# Altium PCB 6路电磁.PcbDoc
Units mil, origin at the board's own origin, x right, y up, seen from the top; angles counter-clockwise.
Board outline 1584.83 x 1269.87 mil, 2 copper layers (Top Layer, Bottom Layer); 42 components, 34 nets, 119 pads, 78 vias.
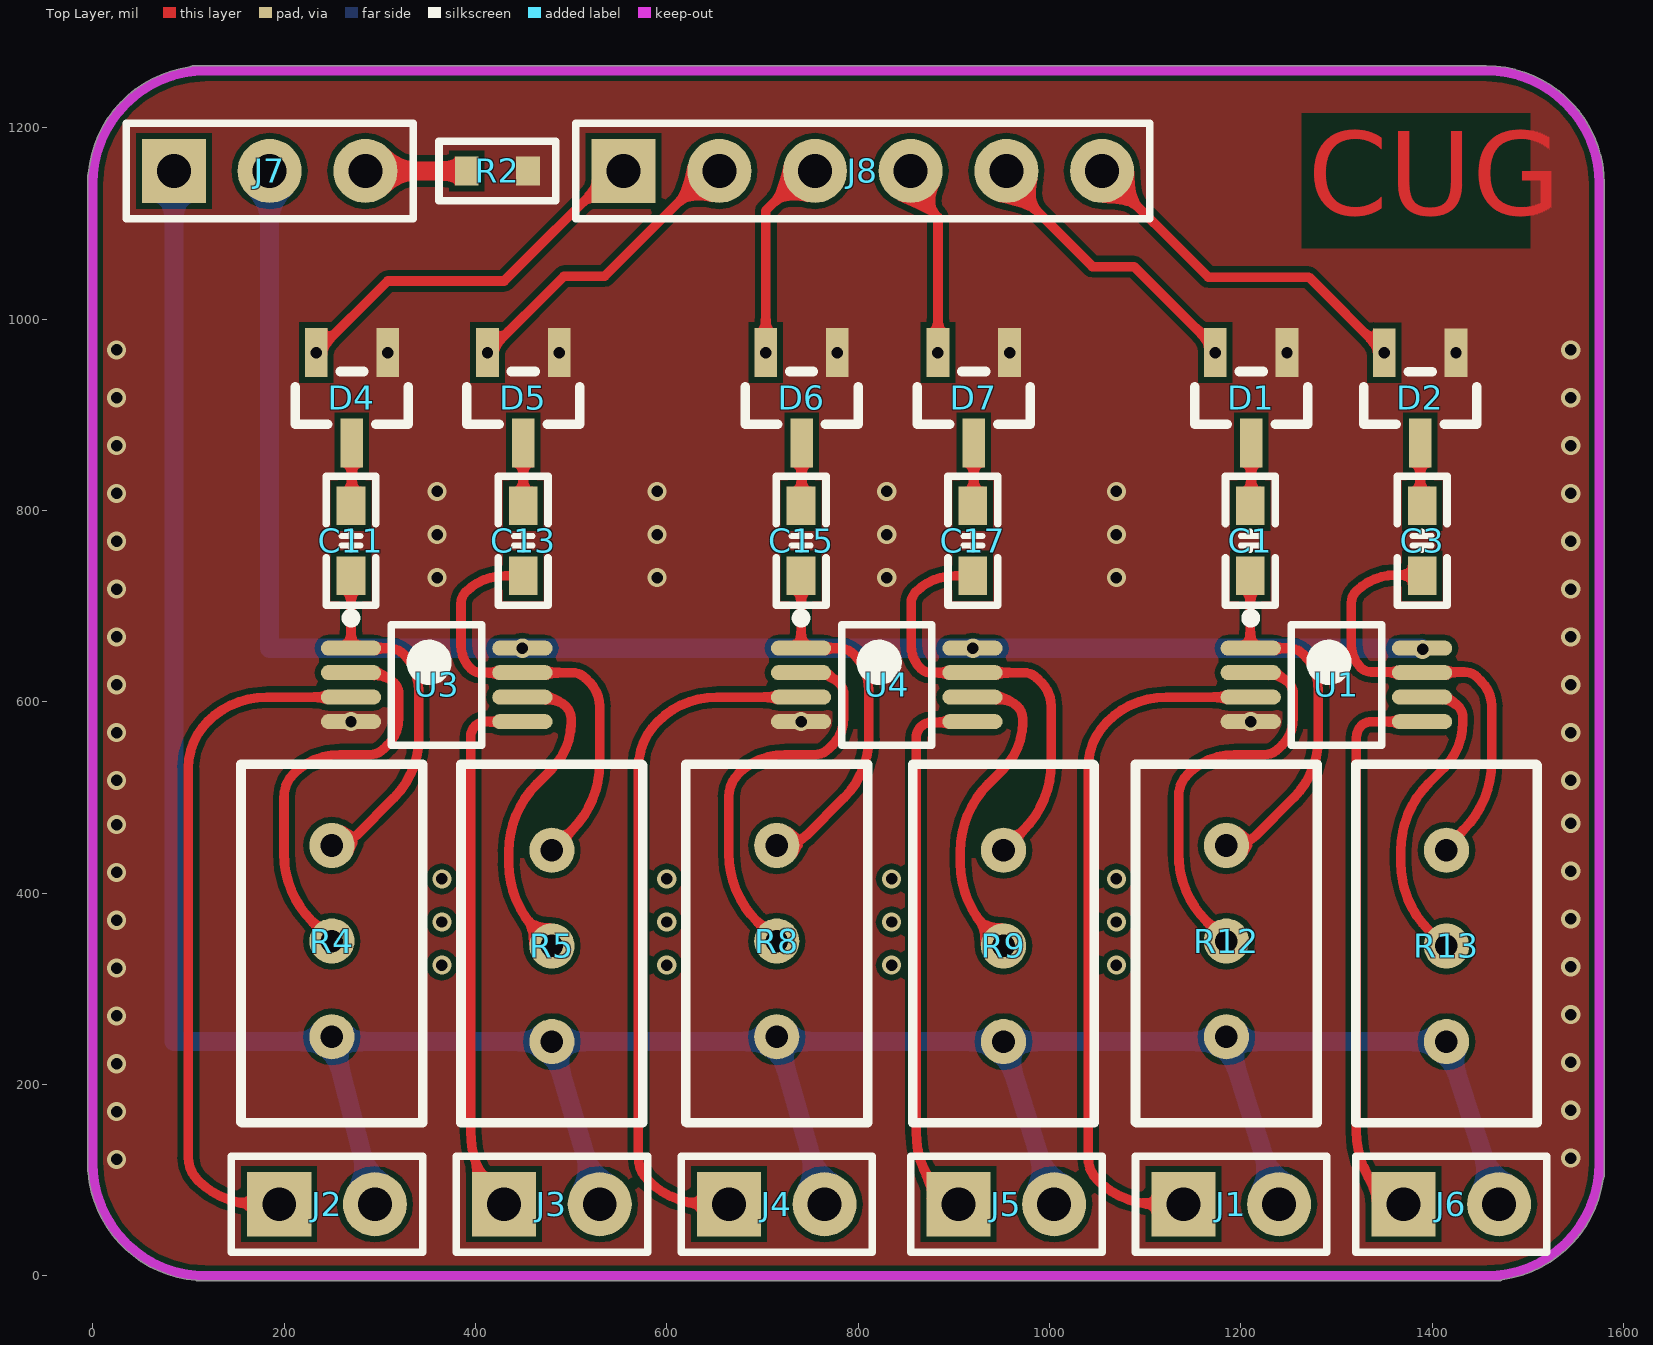
[diagram p0: Top Layer view]
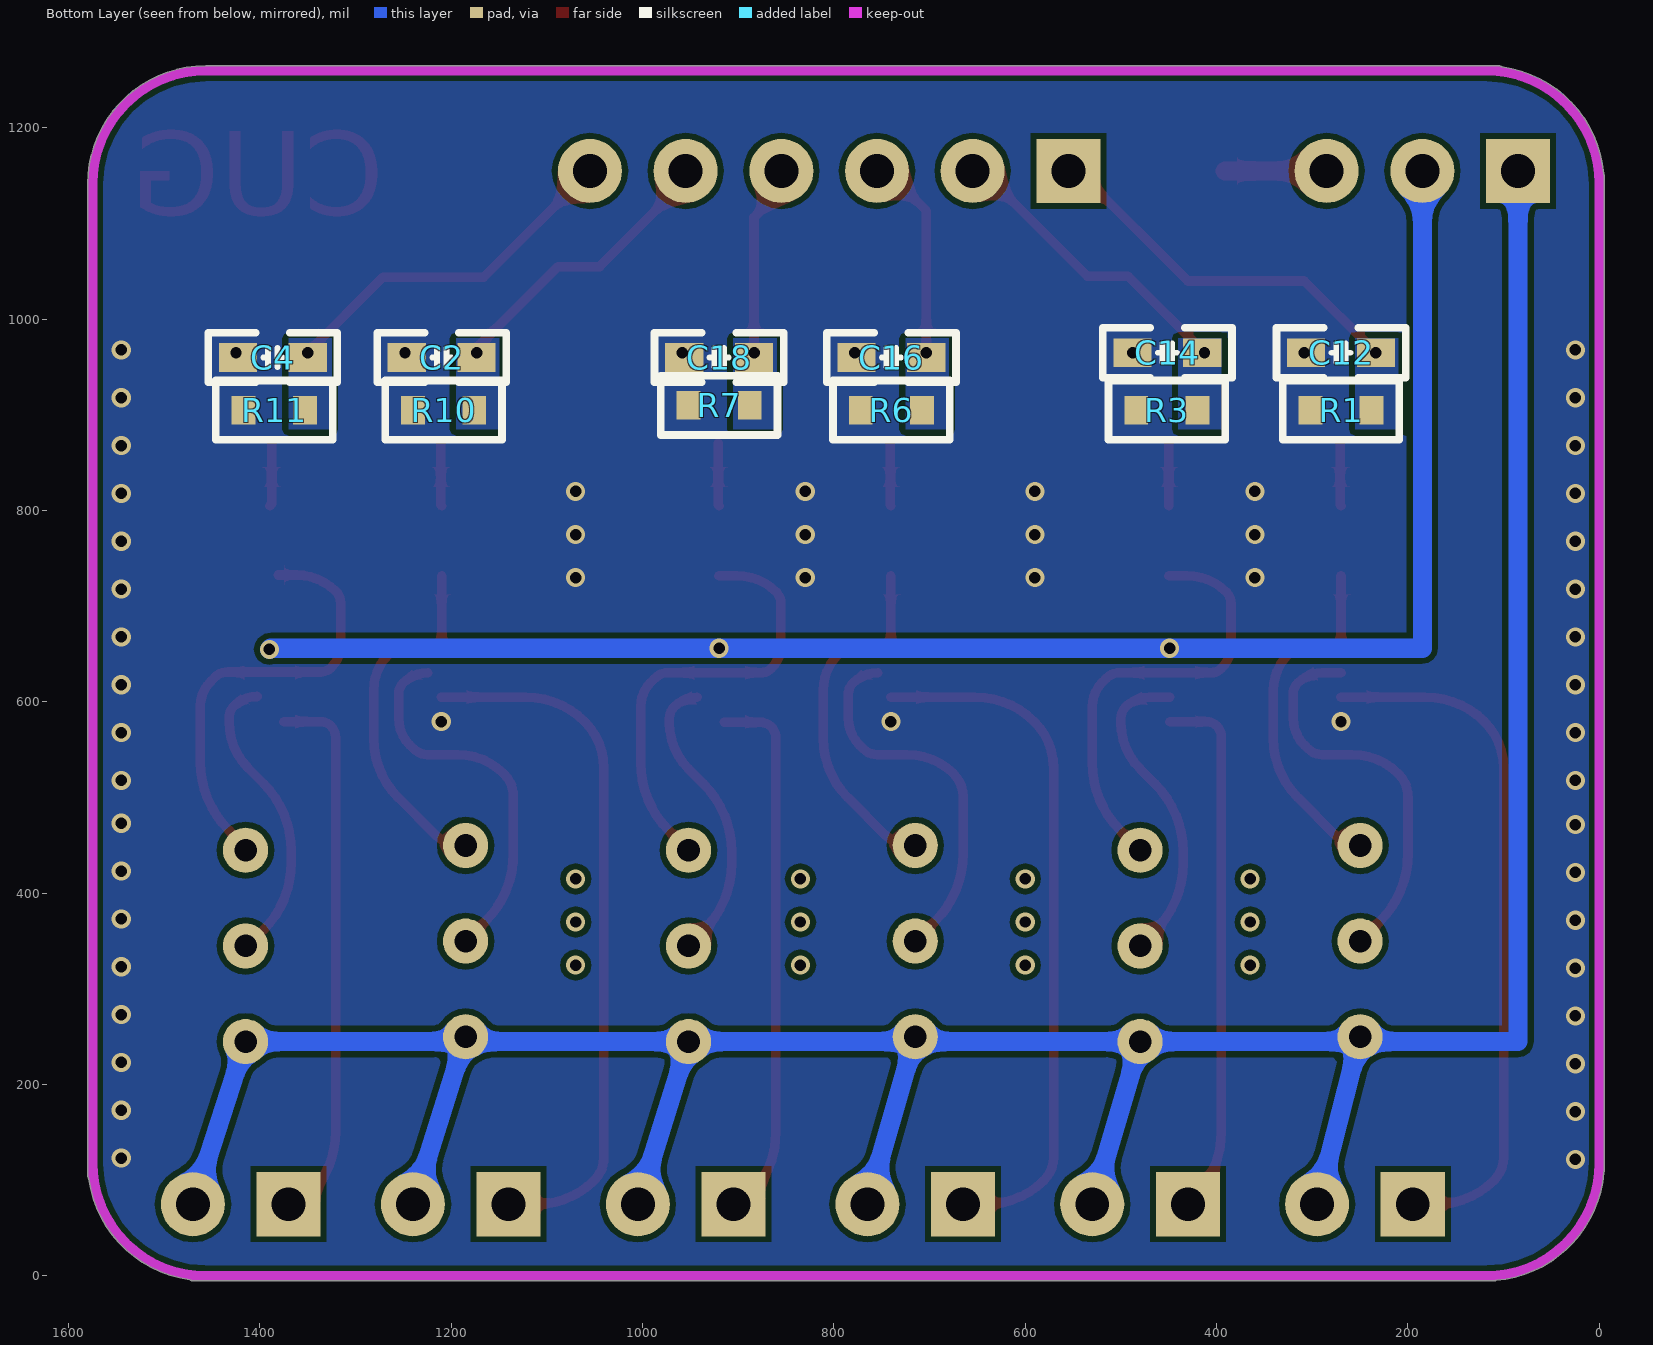
[diagram p1: Bottom Layer view, seen from below]

## Layer stack, top to bottom
Top Solder: solder mask 0.4, Solder Resist, Dk 3.5
Top Layer: signal copper 1.4
Dielectric 1: dielectric 12.6, FR-4, Dk 4.8
Bottom Layer: signal copper 1.4
Bottom Solder: solder mask 0.4, Solder Resist, Dk 3.5

## Board outline
-4.6,108 cw(c0,110) -5.02,110 -5.02,1150 cw(c0,1150) -4.58,1152.04 cw(c118.11,1141.73) 101.9,1263.79 cw(c105,1259.84) 105,1264.86 1456.69,1264.86 cw(c1456.69,1141.73) 1579.82,1141.73 1579.82,104.8 cw(c1574.8,104.8) 1578.72,101.66 1578.71,101.67 cw(c1456.69,118.11) 1473.14,-3.91 cw(c1470,0) 1470,-5.01 110,-5.01 cw(c110,0) 108,-4.6 cw(c118.11,118.11)

## Design rules (kind name [scope] priority, off if disabled: settings)
Clearance [All] p1: gap=6 ignorepadtopadclearanceinfootprint=TRUE except(0: Arc-Hole Track-Hole SMDPad-Hole THPad-Hole Via-Hole Fill-Hole Poly-Hole Region-Hole Text-Hole)
PolygonConnect PolygonConnect_3 [All vs IsNamedPolygon('Bottom Layer-AGND')] p1: connectstyle=Direct reliefconductorwidth=10 reliefentries=4 polygonreliefangle="90 Angle" airgapwidth=10
PolygonConnect PolygonConnect_2 [All vs IsNamedPolygon('Top Layer-AGND')] p2: connectstyle=Direct reliefconductorwidth=10 reliefentries=4 polygonreliefangle="90 Angle" airgapwidth=10
PolygonConnect PolygonConnect_1 [All vs IsNamedPolygon('Bottom Layer-OUT1')] p3: connectstyle=Direct reliefconductorwidth=10 reliefentries=4 polygonreliefangle="90 Angle" airgapwidth=10
PolygonConnect [All] p4: connectstyle=Relief reliefconductorwidth=10 reliefentries=4 polygonreliefangle="90 Angle" airgapwidth=10
RoutingVias [All] p1: holewidth=28 width=50 viastyle="Through Hole" minholewidth=28 minwidth=50 maxholewidth=28 maxwidth=50
SolderMaskExpansion [All] p1: expansion=4
Width [All] p1: maxlimit=100 minlimit=10 preferedwidth=10 minimp=50.000000 maximp=50.000000 favimp=50.000000
30 further rules are at their usual default settings.

## Components (designator, comment, footprint, x,y, rotation, side; value= is the part's Value field where it differs from the comment)
C1 "0.1uF" C0603 1210,768.5 r270 top
C2 "0.1uF" C0603 1210,960 r180 bottom
C3 "0.1uF" C0603 1389.57,768.5 r90 top
C4 "0.1uF" C0603 1386.5,960 r0 bottom
C11 "0.1uF" C0603 270,768.5 r270 top
C12 "0.1uF" C0603 270,965 r180 bottom
C13 "0.1uF" C0603 450,768.5 r90 top
C14 "0.1uF" C0603 451.5,965 r0 bottom
C15 "0.1uF" C0603 740.43,768.5 r270 top
C16 "0.1uF" C0603 740,960 r180 bottom
C17 "0.1uF" C0603 920,768.5 r90 top
C18 "0.1uF" C0603 920,960 r0 bottom
D1 "BAT54S" SOT-23 1210,920 r90 top
D2 "BAT54S" SOT-23 1386.65,919.92 r90 top
D4 "BAT54S" SOT-23 270,920 r90 top
D5 "BAT54S" SOT-23 449.13,920 r90 top
D6 "BAT54S" SOT-23 740,920 r90 top
D7 "BAT54S" SOT-23 920,920 r90 top
J1 "2P" Header-2Pin 1190,75 r0 top
J2 "2P" Header-2pin 245,75 r0 top
J3 "2P" Header-2pin 480,75 r0 top
J4 "2P" Header-2pin 715,75 r0 top
J5 "2P" Header-2pin 955,75 r0 top
J6 "2P" Header-2Pin 1420,75 r0 top
J7 "3PIN" 3PIN 185,1155 r0 top
J8 "ADC 6Pin" "ADC 6Pin" 805,1155 r0 top
R1 "100K" R0603 270,905 r0 bottom
R2 "磁珠" R0603 423,1155 r180 top
R3 "100K" R0603 452,905 r180 bottom
R4 "100K" 电位器 250,350 r270 top
R5 "100K" 电位器 480,345 r90 top
R6 "100K" R0603 740,905 r0 bottom
R7 "100K" R0603 920,910 r180 bottom
R8 "100K" 电位器 715,350 r270 top
R9 "100K" 电位器 952,345 r90 top
R10 "100K" R0603 1208,905 r0 bottom
R11 "100K" R0603 1385,905 r180 bottom
R12 "100K" 电位器 1185,350 r270 top
R13 "100K" 电位器 1415,345 r90 top
U1 "ADA4807-2" AD8217 1300,617.8 r0 top
U3 "ADA4807-2" AD8217 359.57,617.8 r0 top
U4 "ADA4807-2" AD8217 830,617.8 r0 top

## Footprints (in the part's own frame and the unit in brackets; to place one, negate y for a bottom-side part, rotate by r counter-clockwise, add the part's x,y. Pads: shape width x height; smd on the part's side, far side on the other; paste and mask are expansions set on the pad)
3PIN [mm]
  rect 1.7x1.7 hole 0.9: 1(-2.54,0)
  round 1.7 hole 0.9: 2(0,0) 3(2.54,0)
  silkscreen extent -3.81,-1.27 3.81,1.27, body extent -3.81,-1.27 3.81,1.27, height 8.5
AD8217 [mm] "TSOP, 8-Leads, Body 3.00x3.00mm, Pitch 0.65mm, IPC Medium Density"
  oval 1.6x0.4 smd: 1(-2.275,0.975) 2(-2.275,0.325) 3(-2.275,-0.325) 4(-2.275,-0.975) 5(2.275,-0.975) 6(2.275,-0.325) 7(2.275,0.325) 8(2.275,0.975)
  silkscreen extent -2.4,-1.6 1.2,1.9, body extent -1.6,-1.6 1.6,1.6, height 1.1
"ADC 6Pin" [mm]
  rect 1.7x1.7 hole 0.9: 1(-6.35,0)
  round 1.7 hole 0.9: 2(-3.81,0) 3(-1.27,0) 4(1.27,0) 5(3.81,0) 6(6.35,0)
  silkscreen extent -7.62,-1.27 7.62,1.27, body extent -7.62,-1.27 7.62,1.27, height 8.5
C0603 [mil]
  rect 40x30 smd: 1(-36.5,0) 2(36.5,0)
  silkscreen extent -68,-26 68,26, body extent -31,-16 31,16, height 32
Header-2Pin [mm]
  rect 1.7x1.7 hole 0.9: 1(-1.27,0)
  round 1.7 hole 0.9: 2(1.27,0)
  silkscreen extent -2.54,-1.27 2.54,1.27, body extent -2.54,-1.27 2.54,1.27, height 8.5
Header-2pin [mm]
  rect 1.7x1.7 hole 0.9: 1(-1.27,0)
  round 1.7 hole 0.9: 2(1.27,0)
  silkscreen extent -2.54,-1.27 2.54,1.27, body extent -2.54,-1.27 2.54,1.27, height 8.5
R0603 [mil]
  rect 25x30 smd: 1(-32,0) 2(32,0)
  silkscreen extent -61,-31 61,31, body extent -32,-16 30,16, height 18
SOT-23 [mm]
  rect 1.3x0.6 smd: 1(1.145,-0.974) 2(1.145,0.926) 3(-1.255,-0.024)
  silkscreen extent -0.76,-1.52 0.64,1.48
电位器 [mm]
  round 1.2 hole 0.6: 1(-2.54,0) 2(0,0) 3(2.54,0)
  silkscreen extent -4.7,-2.41 4.83,2.41

## Part data
C1 C2 C3 C4 C11 C12 C13 C14 C15 C16 C17 C18: library part MLCC
R1 R2 R3 R6 R7 R10 R11: library part RES
R4 R5 R8 R9 R12 R13: library part 可调电阻

## Via types
v1: diameter 20, hole 12, Top Layer to Bottom Layer, 78 vias

## Nets (pads, with @x,y where several pads share a name; then routed paths per layer and width w, separated by ;. In a path a pad name is that pad's centre, name@x,y a point inside that pad or via, vN(x,y) a via of type N, cw(c..) or ccw(c..) an arc to the next point about the centre after c; other vN are vias at no path point)
2.5V: J1.2 J2.2 J3.2 J4.2 J5.2 J6.2 J7.1 R4.3 R5.1 R8.3 R9.1 R12.3 R13.1 | length 3320.1
  Bottom Layer w20: J7.1 85,245 R4.3@251.29,245 ; R4.3 R4.3@251.29,245 ; J2.2 R4.3@251.29,245 ; R5.1 J3.2 ; R8.3 R8.3@716.43,245 ; J4.2 R8.3@716.43,245 ; R9.1 J5.2 ; R12.3 R12.3@1186.57,245 ; J1.2 R12.3@1186.57,245 ; J6.2 R13.1 R12.3@1186.57,245 ; R4.3@251.29,245 R8.3@716.43,245 ; R8.3@716.43,245 R12.3@1186.57,245
5V: J7.2 U1.8 U3.8 U4.8 | length 1704.3
  Bottom Layer w20: J7.2 185,656.18 v1(449.13,656.18) v1(920,656.18) 1388.82,656.18 v1(1390,655)
AGND: C2.1 C4.2 C12.1 C14.2 C16.1 C18.2 D1.1 D2.1 D4.1 D5.1 D6.1 D7.1 R1.2 R2.1 R3.1 R6.2 R7.1 R10.2 R11.1 U1.4 U3.4 U4.4
  other v1: 25,121.78 1545,123.18 25,171.78 1545,173.18 25,221.78 1545,223.18 25,271.78 1545,273.18 25,321.78 1545,323.18 25,371.78 1545,373.18 25,421.78 1545,423.18 25,471.78 1545,473.18 25,518.01 1545,518.02 25,568.01 1545,568.02 270,579.41 740.43,579.41 1210.43,579.41 25,618.01 1545,618.02 25,668.01 1545,668.02 25,718.01 1545,718.02 360,730 590,730 830,730 1070,730 25,768.01 1545,768.02 360,775 590,775 830,775 1070,775 25,818.01 1545,818.02 360,820 590,820 830,820 1070,820 25,868.01 1545,868.02 25,918.01 1545,918.02 308.35,965.08 487.48,965.08 778.35,965.08 958.35,965.08 1248.35,965.08 1425,965 25,968.01 1545,968.02
GND: J7.3 R2.2 | length 106
  Top Layer w20: J7.3 R2.2
IN1: J2.1 U3.3 | length 736
  Top Layer w10: J2.1 170.36,75 cw(c170.36,160.36) 110,100 cw(c134.14,124.14) 100,124.14 100,531.12 cw(c168.28,531.12) 120,579.41 cw(c181.78,517.63) 181.78,605 U3.3
IN2: J3.1 U3.5 | length 561.8
  Top Layer w10: J3.1 424.29,80.71 cw(c495,151.42) 395,151.42 395,562.93 cw(c412.07,562.93) 400,575 cw(c410.65,564.35) 410.65,579.41 U3.5
IN3: J4.1 U4.3 | length 736
  Top Layer w10: J4.1@665.43,75 640.79,75 cw(c640.79,160.36) 580.43,100 cw(c604.58,124.14) 570.43,124.14 570.43,531.12 cw(c638.72,531.12) 590.43,579.41 cw(c652.22,517.63) 652.22,605 U4.3
IN4: J5.1 U4.5 | length 553.8
  Top Layer w10: J5.1@890,80 cw(c960.71,150.71) 860.71,150.71 860.71,562.22 cw(c877.78,562.22) 865.71,574.29 cw(c876.36,563.64) 876.36,578.7 U4.5@914.84,578.7
IN5: J1.1 U1.3 | length 736
  Top Layer w10: J1.1@1135.43,75 1110.79,75 cw(c1110.79,160.36) 1050.43,100 cw(c1074.58,124.14) 1040.43,124.14 1040.43,531.12 cw(c1108.72,531.12) 1060.43,579.41 cw(c1122.22,517.63) 1122.22,605 U1.3
IN6: J6.1 U1.5 | length 553.8
  Top Layer w10: J6.1@1350.2,80.71 cw(c1420.91,151.42) 1320.91,151.42 1320.91,562.93 cw(c1337.98,562.93) 1325.91,575 cw(c1336.55,564.35) 1336.55,579.41 U1.5@1375.04,579.41
NetC1_1: C1.1 D1.3 | length 66
  Top Layer w10: C1.1 1210.95,805.95 D1.3
NetC1_2: C1.2 R12.1 U1.1 | length 377.9
  Top Layer w10: R12.1@1190.43,450 ccw(c1190.43,486.21) 1216.04,460.61 1255.43,500 ccw(c1193.32,562.11) 1281.16,562.11 1281.16,612.03 ccw(c1227.47,612.03) 1265.43,650 ccw(c1250.51,635.08) 1250.51,656.18 U1.1 1210,656.61 C1.2
NetC3_1: C3.1 R13.3 U1.7 | length 472.3
  Top Layer w10: U1.7@1379.76,631.3 1336.27,631.3 cw(c1336.27,646.36) 1325.63,635.71 cw(c1349.77,659.85) 1315.63,659.85 1315.63,703.64 cw(c1332.7,703.64) 1320.63,715.71 cw(c1361.67,674.67) 1361.67,732.71 C3.1@1380.63,732.71 ; U1.7@1381.33,631.3 1433.7,631.3 cw(c1433.7,612.21) 1447.2,625.71 1451.59,621.32 cw(c1425.98,595.71) 1462.2,595.71 1462.2,537.13 cw(c1362.2,537.13) 1432.91,466.42 R13.3@1412.2,445.71
NetC3_2: C3.2 D2.3 | length 66.3
  Top Layer w10: D2.3 1387.6,806.97 C3.2
NetC11_1: C11.1 D4.3 | length 66
  Top Layer w10: C11.1 270.95,805.95 D4.3
NetC11_2: C11.2 R4.1 U3.1 | length 377.7
  Top Layer w10: R4.1 ccw(c250,486.21) 275.61,460.61 315,500 ccw(c252.89,562.11) 340.73,562.11 340.73,612.03 ccw(c287.03,612.03) 325,650 ccw(c310.08,635.08) 310.08,656.18 U3.1 C11.2
NetC13_1: C13.1 R5.3 U3.7 | length 472.3
  Top Layer w10: C13.1 431.04,732 ccw(c431.04,673.96) 390,715 ccw(c402.07,702.93) 385,702.93 385,659.14 ccw(c419.14,659.14) 395,635 ccw(c405.65,645.65) 405.65,630.59 U3.7 501.5,630.59 cw(c501.5,611.5) 515,625 519.39,620.61 cw(c493.79,595) 530,595 530,536.42 cw(c430,536.42) 500.71,465.71 R5.3
NetC13_2: C13.2 D5.3 | length 65.6
  Top Layer w10: C13.2 450.08,805.08 D5.3
NetC15_1: C15.1 D6.3 | length 65.8
  Top Layer w10: C15.1 740.95,805.51 D6.3
NetC15_2: C15.2 R8.1 U4.1 | length 377.7
  Top Layer w10: R8.1@720.43,450 ccw(c720.43,486.21) 746.04,460.61 785.43,500 ccw(c723.32,562.11) 811.16,562.11 811.16,612.03 ccw(c757.47,612.03) 795.43,650 ccw(c780.51,635.08) 780.51,656.18 U4.1 C15.2
NetC17_1: C17.1 R9.3 U4.7 | length 472.3
  Top Layer w10: U4.7 876.08,630.59 cw(c876.08,645.65) 865.43,635 cw(c889.58,659.14) 855.43,659.14 855.43,702.93 cw(c872.5,702.93) 860.43,715 cw(c901.47,673.96) 901.47,732 C17.1@920.43,732 ; U4.7@921.13,630.59 973.5,630.59 cw(c973.5,611.5) 987,625 991.39,620.61 cw(c965.79,595) 1002,595 1002,536.42 cw(c902,536.42) 972.71,465.71 R9.3
NetC17_2: C17.2 D7.3 | length 66
  Top Layer w10: C17.2 920.95,805.95 D7.3
NetR4_2: R4.2 U3.2 | length 418.3
  Top Layer w10: R4.2 229.29,370.71 cw(c300,441.42) 200,441.42 200,500.86 cw(c234.14,500.86) 210,525 cw(c258.28,476.72) 258.28,545 290,545 ccw(c290,565.15) 304.25,550.9 308.35,555 ccw(c280.21,583.13) 320,583.13 320,607.93 ccw(c302.93,607.93) 315,620 ccw(c289.43,594.43) 289.43,630.59 U3.2
NetR5_2: R5.2 U3.6 | length 333.9
  Top Layer w10: U3.6 470.86,605 cw(c470.86,570.86) 495,595 cw(c482.93,582.93) 500,582.93 500,578.28 cw(c431.72,578.28) 480,530 464.29,514.29 ccw(c535,443.58) 435,443.58 435,431.42 ccw(c535,431.42) 464.29,360.71 R5.2
NetR8_2: R8.2 U4.2 | length 398.9
  Top Layer w10: R8.2 694.29,370.71 cw(c765,441.42) 665,441.42 665,500.86 cw(c699.14,500.86) 675,525 cw(c723.28,476.72) 723.28,545 755,545 ccw(c755,565.15) 769.25,550.9 773.35,555 ccw(c745.21,583.13) 785,583.13 785,607.93 ccw(c767.93,607.93) 780,620 ccw(c754.43,594.43) U4.2@754.43,630.59
NetR9_2: R9.2 U4.6 | length 312.2
  Top Layer w10: U4.6@942.86,605 cw(c942.86,570.86) 967,595 cw(c954.93,582.93) 972,582.93 972,578.28 cw(c903.72,578.28) 952,530 936.29,514.29 ccw(c1007,443.58) 907,443.58 907,431.42 ccw(c1007,431.42) 936.29,360.71 R9.2
NetR12_2: R12.2 U1.2 | length 797.8
  Top Layer w10: 1135,441.42 ccw(c1235,441.42) 1164.29,370.71 ; 1135,441.42 ccw(c1235,441.42) 1164.29,370.71 ; 1135,441.42 1135,500.86 ; 1135,441.42 1135,500.86 ; 1135,500.86 cw(c1169.14,500.86) 1145,525 ; 1135,500.86 cw(c1169.14,500.86) 1145,525 ; 1145,525 cw(c1193.28,476.72) 1193.28,545 ; 1145,525 cw(c1193.28,476.72) 1193.28,545 ; 1164.29,370.71 R12.2 1164.29,370.71 ; 1193.28,545 1225,545 ; 1193.28,545 1225,545 ; 1225,545 ccw(c1225,565.15) 1239.25,550.9 ; 1225,545 ccw(c1225,565.15) 1239.25,550.9 ; 1239.25,550.9 1243.35,555 ; 1239.25,550.9 1243.35,555 ; 1243.35,555 ccw(c1215.21,583.13) 1255,583.13 ; 1243.35,555 ccw(c1215.21,583.13) 1255,583.13 ; 1250,620 ccw(c1224.43,594.43) 1224.43,630.59 cw(c1224.43,594.43) 1250,620 ; 1250,620 cw(c1237.93,607.93) 1255,607.93 ; 1250,620 cw(c1237.93,607.93) 1255,607.93 ; 1255,583.13 1255,607.93 ; 1255,583.13 1255,607.93
NetR13_2: R13.2 U1.6 | length 312.2
  Top Layer w10: U1.6@1403.05,605.71 cw(c1403.05,571.57) 1427.2,595.71 cw(c1415.12,583.64) 1432.2,583.64 1432.2,578.99 cw(c1363.91,578.99) 1412.2,530.71 1396.49,515 ccw(c1467.2,444.29) 1367.2,444.29 1367.2,432.13 ccw(c1467.2,432.13) 1396.49,361.42 R13.2@1412.2,345.71
OUT1: C12.2 D4.2 J8.1 R1.1 | length 383.1
  Top Layer w10: v1(233.54,965.08) 308.46,1040 430,1040 J8.1@540,1150
OUT2: C14.1 D5.2 J8.2 R3.2 | length 303.9
  Top Layer w10: v1(412.68,965.08) 492.6,1045 535,1045 J8.2@640,1150
OUT3: C16.2 D6.2 J8.3 R6.1 | length 200
  Top Layer w10: v1(703.54,965.08) 703.54,1113.54 J8.3@740,1150
OUT4: C18.1 D7.2 J8.4 R7.2 | length 203
  Top Layer w10: J8.4@840,1150 883.54,1106.46 v1(883.54,965.08)
OUT5: C2.2 D1.2 J8.5 R10.1 | length 301
  Top Layer w10: J8.5 955,1145 1045,1055 1088.62,1055 D1.2@1173.54,970.08
  other v1: 1173.54,965.08
OUT6: C4.1 D2.2 J8.6 R11.2 | length 373.9
  Top Layer w10: J8.6 1166,1044 1271.2,1044 v1(1350.2,965)
copper on no net:
  other v1: 365,325 600,325 835,325 1070,325 365,370 600,370 835,370 1070,370 365,415 600,415 835,415 1070,415

## Polygon pours and split planes (outlines as drawn)
AGND on Bottom Layer "Bottom Layer-AGND" (solid, remove dead copper, pour order 26): -5,-5 -9.86,1264.86 -9.88,1270 1580,1264.86 1580,0
AGND on Bottom Layer "Bottom Layer-OUT1" (solid, remove dead copper, pour order 22): 1400,980 1445,980 1445,885 1400,885
OUT6 on Bottom Layer "Bottom Layer-OUT1" (solid, remove dead copper, pour order 20): 1325,980 1370,980 1370,885 1325,885
AGND on Bottom Layer "Bottom Layer-OUT1" (solid, remove dead copper, pour order 18): 1225,980 1270,980 1270,885 1225,885
OUT5 on Bottom Layer "Bottom Layer-OUT1" (solid, remove dead copper, pour order 16): 1150,980 1195,980 1195,885 1150,885
AGND on Bottom Layer "Bottom Layer-OUT1" (solid, remove dead copper, pour order 14): 930,980 975,980 975,885 930,885
OUT4 on Bottom Layer "Bottom Layer-OUT1" (solid, remove dead copper, pour order 12): 860,980 905,980 905,885 860,885
AGND on Bottom Layer "Bottom Layer-OUT1" (solid, remove dead copper, pour order 10): 755,980 800,980 800,885 755,885
OUT3 on Bottom Layer "Bottom Layer-OUT1" (solid, remove dead copper, pour order 8): 680,980 725,980 725,885 680,885
AGND on Bottom Layer "Bottom Layer-OUT1" (solid, remove dead copper, pour order 6): 465,980 510,980 510,885 465,885
OUT2 on Bottom Layer "Bottom Layer-OUT1" (solid, remove dead copper, pour order 4): 395,980 440,980 440,885 395,885
AGND on Bottom Layer "Bottom Layer-OUT1" (solid, remove dead copper, pour order 2): 285,980 330,980 330,885 285,885
OUT1 on Bottom Layer "Bottom Layer-OUT1" (solid, remove dead copper, pour order 0): 210,980 255,980 255,885 210,885
AGND on Top Layer "Top Layer-AGND" (solid, remove dead copper, pour order 24): 0,0 -5,5 -5,1255 1580,1255 1580,-5

## Keep-outs
Keep-Out Layer:
  lines w10: 0,110 0,1150 ; 0,118.11 ccw(c118.11,118.11) 118.11,0 ; 0,1141.73 cw(c118.11,1141.73) 118.11,1259.84 ; 105,1259.84 1456.69,1259.84 cw(c1456.69,1141.73) 1574.8,1141.73 1574.8,104.8 ; 110,0 1470,0 ; 1456.69,0 ccw(c1456.69,118.11) 1574.8,118.11

## Other copper
Top Layer:
  text "CUG" at 1269.94,1080 h150

## Silkscreen, mask and mechanical layers (free items; w line width, h text height)
Top Solder:
  text "CUG" at 1270,1080 h150